# Altium PCB old.PCB4.PcbDoc
Units mm, origin at the board's own origin, x right, y up, seen from the top; angles counter-clockwise.
Board outline 66.42 x 80.14 mm, 2 copper layers (Top Layer, Bottom Layer); 59 components, 64 nets, 251 pads, 43 vias.
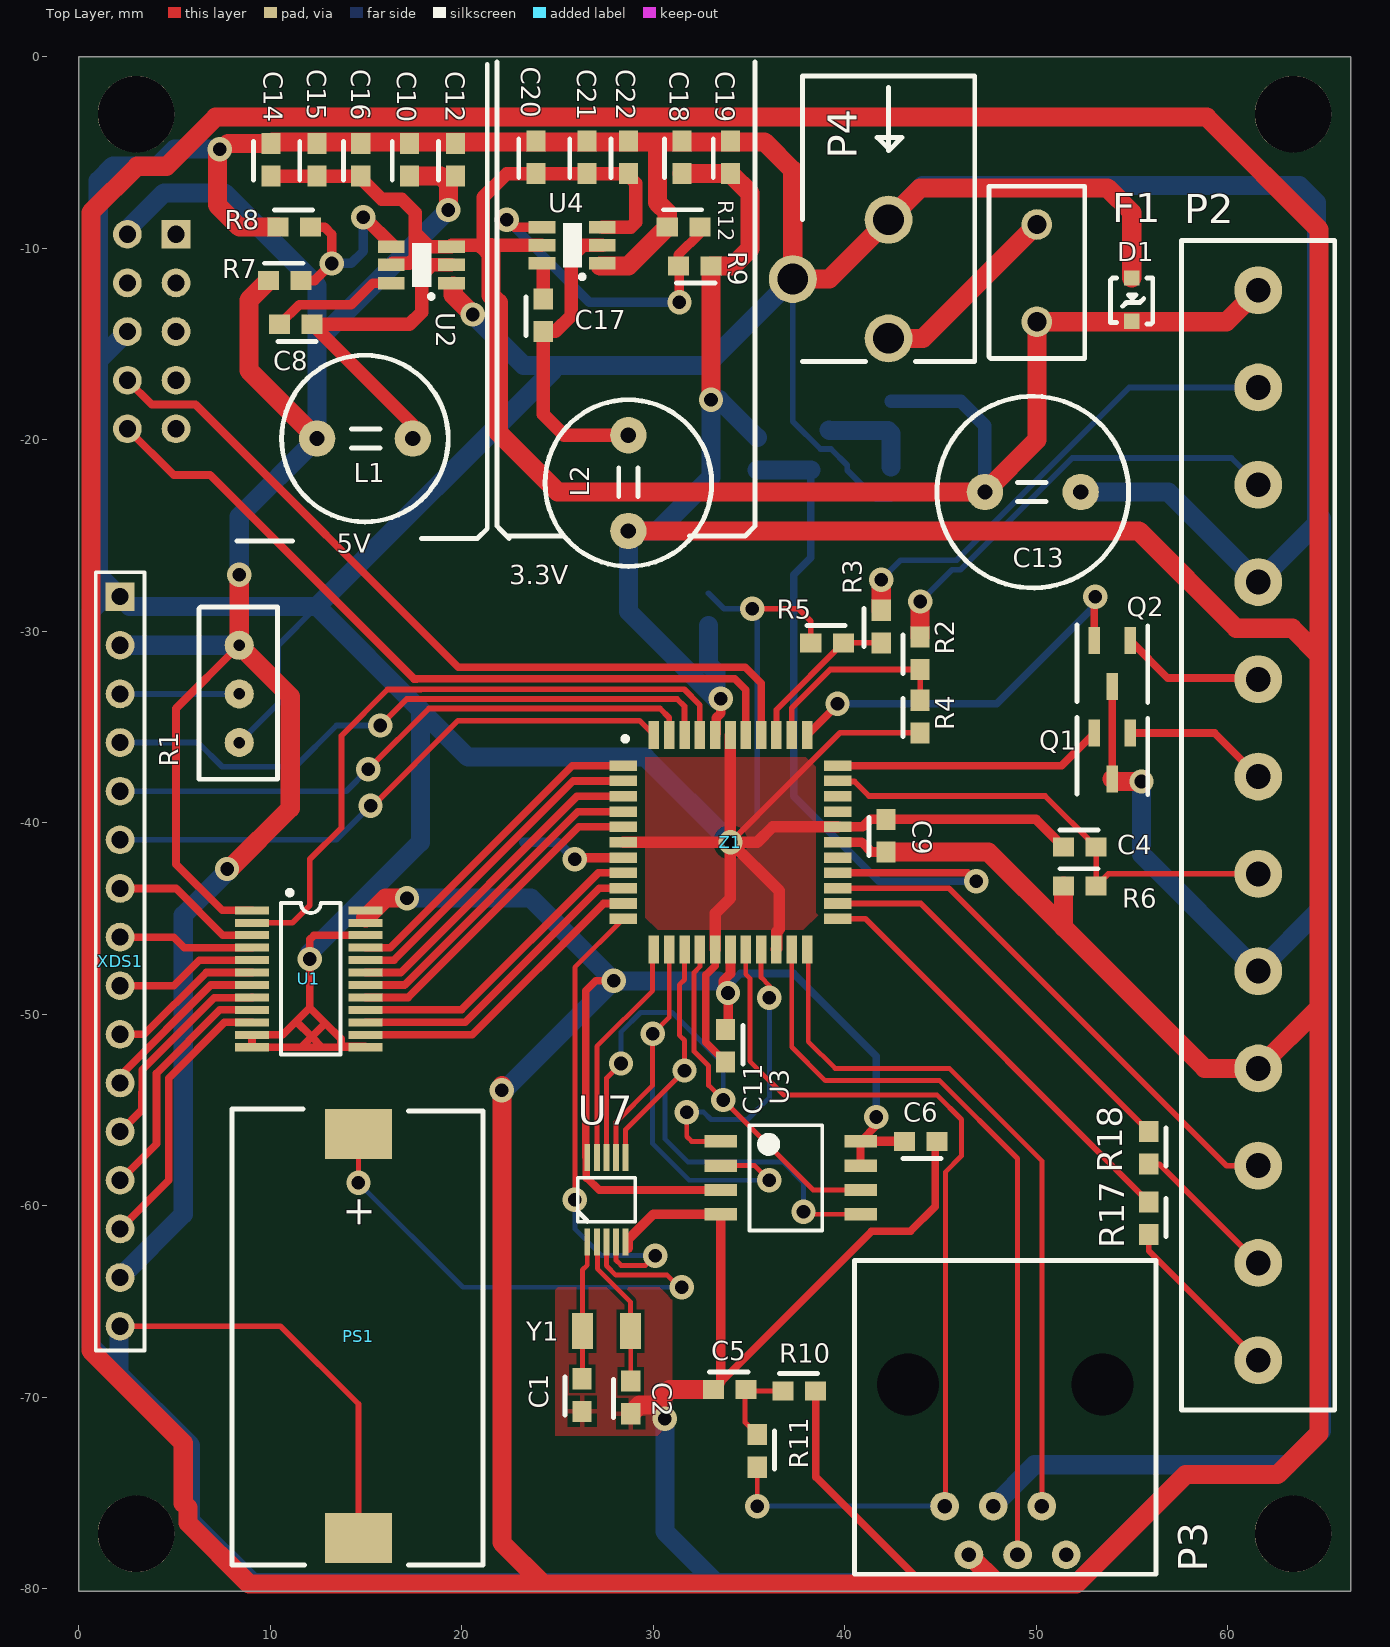
[diagram p0: Top Layer view]
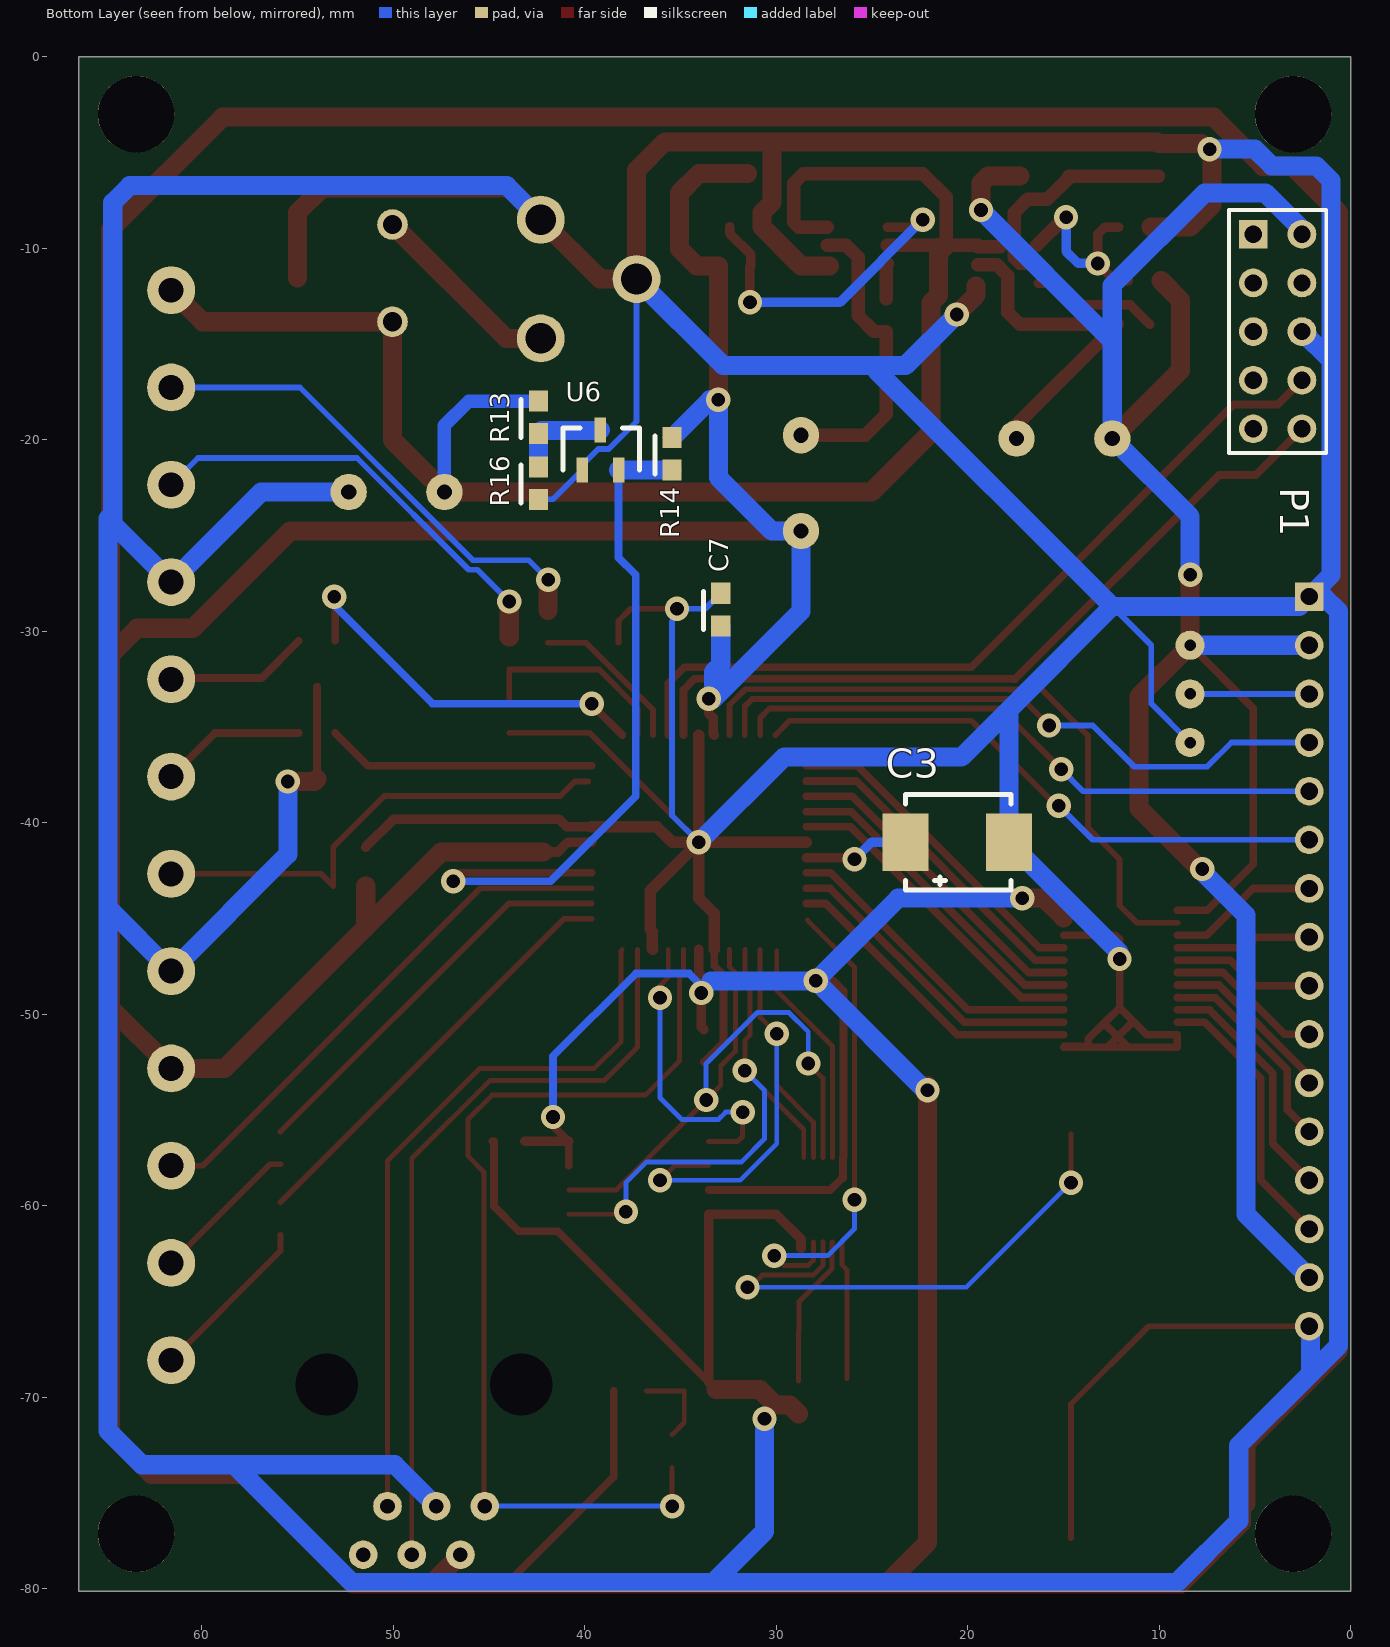
[diagram p1: Bottom Layer view, seen from below]

## Layer stack, top to bottom
Top Solder: solder mask 0.0102, Solder Resist, Dk 3.5
Top Layer: signal copper 0.0356
Dielectric 1: dielectric 0.32, FR-4, Dk 4.8
Bottom Layer: signal copper 0.0356
Bottom Solder: solder mask 0.0102, Solder Resist, Dk 3.5

## Board outline
0,-80.137 66.421,-80.137 66.421,0 0,0

## Design rules (kind name [scope] priority, off if disabled: settings)
Clearance [All] p1: gap=0.2 ignorepadtopadclearanceinfootprint=FALSE except(0: Arc-Hole Track-Hole SMDPad-Hole THPad-Hole Via-Hole Fill-Hole Poly-Hole Region-Hole Text-Hole)
HoleSize [All] p1: absolutevalues=TRUE maxlimit=999 minlimit=0.2 maxpercent=80.000 minpercent=20.000
MinimumSolderMaskSliver [All] p1: minsoldermaskwidth=0.1
PolygonConnect [All] p1: connectstyle=Relief reliefconductorwidth=0.254 reliefentries=4 polygonreliefangle="90 Angle" airgapwidth=0.254
RoutingVias [All] p1: holewidth=0.711 width=1.27 viastyle="Through Hole" minholewidth=0.711 minwidth=1.27 maxholewidth=0.711 maxwidth=1.27
SilkToSilkClearance [All] p1: silktosilkclearance=0.1
SilkToSolderMaskClearance [IsPad] p1: minsilkscreentomaskgap=0.1 clearancetoexposedcopper=TRUE
SolderMaskExpansion [All] p1: expansion=0.102
Width [All] p1: maxlimit=10 minlimit=0.254 preferedwidth=0.254
26 further rules are at their usual default settings.

## Classes and differential pairs
component class Ecran: R1 U1 XDS1
component class OTHER: P1 P2 Q1 Q2 R2 R3 R4 R5 R17 R18
component class PIC: C1 C2 C3 C4 C5 C6 C7 C9 C11 P3 R6 R10 R11 U3 U7 Y1 Z1
component class Power: 1 C8 C10 C12 C13 C14 C15 C16 C17 C18 C19 C20 C21 C22 D1 F1 L1 L2 P4 PS1 R7 R8 R9 R12 R13 R14 R16 U2 U4 U6
component class VRAIMENTHORSPCB: * B1 D4 DS1 MCL039PURGW P5
net class RG_LED[0..1]: RG_LED0 RG_LED1
net class S_D[0..7]: S_D0 S_D1 S_D2 S_D3 S_D4 S_D5 S_D6 S_D7

## Components (designator, comment, footprint, x,y, rotation, side; value= is the part's Value field where it differs from the comment)
C1 "18pF" 0603 26.289,-70.739 r90 top
C2 "18pF" 0603 28.829,-70.866 r90 top
C3 "10uF" C3 23.241,-41.021 r180 bottom
C4 "100nF" 0603 51.435,-41.275 r0 top
C5 "0.1uF" 0603 33.147,-69.596 r0 top
C6 "22uF" 0603 44.831,-56.642 r180 top
C7 "0.1uF" 0603 32.893,-29.718 r90 bottom
C8 "0.1uF" 0603 12.192,-13.97 r180 top
C9 "0.1uF" 0603 42.164,-41.529 r90 top
C10 "22uF" 0603 17.27,-6.231 r90 top
C11 "0.1uF" 0603 33.782,-50.8 r270 top
C12 "22uF" 0603 19.683,-6.231 r90 top
C13 "1000uF" Condo_trav 52.324,-22.733 r180 top
C14 "10uF" 0603 10.031,-6.231 r90 top
C15 "10uF" 0603 12.444,-6.231 r90 top
C16 "0.1uF" 0603 14.73,-6.231 r90 top
C17 "0.1uF" 0603 24.257,-14.351 r90 top
C18 "22uF" 0603 31.498,-6.104 r90 top
C19 "22uF" 0603 34.038,-6.104 r90 top
C20 "10uF" 0603 23.878,-6.104 r90 top
C21 "10uF" 0603 26.545,-6.104 r90 top
C22 "0.1uF" 0603 28.702,-6.104 r90 top
D1 "Diode 10TQ035" DiodeZin 54.991,-11.557 r270 top
F1 "Fuse 1" FUSIBLE 50.038,-8.763 r270 top
L1 "4.7uH" "Bobine Traversante 4.7" 12.446,-19.939 r0 top
L2 "3.3uH" "Bobine Traversante 4.7" 28.702,-24.765 r90 top
P1 "61304021121" HDR2X5 5.08,-9.271 r270 bottom
P2 "31101112" Bornier12 61.595,-68.072 r90 top
P3 "90512-001LF" RJ12 43.307,-69.342 r0 top
P4 "FC681465P" JackAlim 42.291,-8.509 r270 top
PS1 "Support Pile" Pile 14.605,-56.261 r270 top
Q1 "MOSFET-N" nouveau_mosfetN 53.975,-37.719 r180 top
Q2 "MOSFET-N" nouveau_mosfetN 53.975,-32.893 r180 top
R1 "20k" POTARD 8.382,-30.734 r270 top
R2 "300k" 0603 43.942,-32.004 r90 top
R3 "300k" 0603 41.91,-30.607 r90 top
R4 "100k" 0603 43.942,-35.306 r90 top
R5 "100k" 0603 38.227,-30.607 r0 top
R6 "330" 0603 51.435,-43.307 r0 top
R7 "54.9K" 0603 9.906,-11.684 r0 top
R8 "10K" 0603 10.412,-8.898 r0 top
R9 "33.2K" 0603 33.02,-10.922 r180 top
R10 "10K" 0603 36.781,-69.674 r0 top
R11 "1Ko" 0603 35.433,-71.96 r270 top
R12 "10K" 0603 30.734,-8.89 r0 top
R13 "300k" 0603 42.418,-19.685 r90 bottom
R14 "330" 0603 35.433,-21.59 r90 bottom
R16 "100k" 0603 42.418,-23.114 r90 bottom
R17 "60.4" 0603 55.88,-59.817 r270 top
R18 "75" 0603 55.88,-56.134 r270 top
U1 "74LVX4245MTCX" TRANS 14.986,-44.577 r270 top
U2 "TPS562201DDCT" TPS562201DDCT 17.016,-11.819 r90 top
U3 "SST25VF016B-50-4C-S2AF-T" FLASH 33.528,-56.642 r0 top
U4 "TPS562201DDCT" TPS562201DDCT 24.892,-10.795 r90 top
U6 "LM809M3-3.08/NOPB" LM809 40.132,-21.59 r90 bottom
U7 "MCP79510-I/MS" rtc 27.559,-59.69 r90 top
XDS1 "1-826629-6" HDR1X16 2.159,-28.194 r270 top
Y1 "32.768kHz" QUARTZ32KHz 27.559,-66.548 r0 top
Z1 "PIC32MX170F256D-I/PT" TQFP-44_L 34.036,-41.021 r0 top

## Footprints (in the part's own frame and the unit in brackets; to place one, negate y for a bottom-side part, rotate by r counter-clockwise, add the part's x,y. Pads: shape width x height; smd on the part's side, far side on the other; paste and mask are expansions set on the pad)
0603 [mm] "Chip Inductor, Body 0.6x0.3mm, IPC High Density"
  rect 1.1x1 smd: 1(0,0) 2(1.7,0)
  silkscreen extent -0.2,0.9 1.8,0.9
"Bobine Traversante 4.7" [mm]
  round 1.9 hole 0.8: 1(0,0) 2(5,0)
  silkscreen extent -1.85,-4.35 6.85,4.35
Bornier12 [mm]
  round 2.5 hole 1.3: 1(0,0) 2(5.08,0) 3(10.16,0) 4(15.24,0) 5(20.32,0) 6(25.4,0) 7(30.48,0) 8(35.56,0) 9(40.64,0) 10(45.72,0) 11(50.8,0) 12(55.88,0)
  silkscreen extent -2.6,-4 58.48,4
C3 [mm]
  rect 2.4x3 smd: 1(0,0) 2(5.4,0)
  silkscreen extent 0,-2.5 5.5,2.5
Condo_trav [mm]
  round 1.9 hole 0.8: 1(0,0) 2(5,0)
  silkscreen extent -2.5,-5 7.5,5
DiodeZin [mm]
  rect 0.8x0.8 smd: 1(2.25,0) 3(0,0)
  silkscreen extent 0,-1.1 2.4,1.1
FLASH [mm] "8-Pin Plastic Medium Body Small Outline Package 1.27 mm Pitch, IPC Medium Density"
  rect 1.7x0.65 smd: 1(0,0) 2(0,-1.27) 3(0,-2.54) 4(0,-3.81) 5(7.3,-3.81) 6(7.3,-2.54) 7(7.3,-1.27) 8(7.3,0)
  silkscreen extent 1.5,-4.65 5.3,0.84
FUSIBLE [mm]
  round 1.6 hole 1: 1(0,0) 2(5.08,0)
  silkscreen extent -2,-2.5 7,2.5
HDR1X16 [mm] "Connector; Header; 16 Position"
  rect 1.5x1.5 hole 0.9: 1(0,0)
  round 1.5 hole 0.9: 2(2.54,0) 3(5.08,0) 4(7.62,0) 5(10.16,0) 6(12.7,0) 7(15.24,0) 8(17.78,0) 9(20.32,0) 10(22.86,0) 11(25.4,0) 12(27.94,0) 13(30.48,0) 14(33.02,0) 15(35.56,0) 16(38.1,0)
  silkscreen extent -1.27,-1.27 39.37,1.27
HDR2X5 [mm] "Connector; Header; 5x2 Position"
  rect 1.5x1.5 hole 0.9: 1(0,0)
  round 1.5 hole 0.9: 2(0,2.54) 3(2.54,0) 4(2.54,2.54) 5(5.08,0) 6(5.08,2.54) 7(7.62,0) 8(7.62,2.54) 9(10.16,0) 10(10.16,2.54)
  silkscreen extent -1.27,-1.27 11.43,3.81
JackAlim [mm]
  round 2.5 hole 1.6: 1(6.2,0) 2(3.1,-5) 3(0,0)
  silkscreen extent -7.5,-4.5 7.4,4.5
LM809 [mm]
  rect 1.3x0.6 smd: 1(0,0) 2(0,-1.9) 3(2.1,-0.95)
  silkscreen extent 0,-3 2.2,1
nouveau_mosfetN [mm]
  rect 0.6x1.4 smd: 1(-0.95,-2.4) 2(0.95,-2.4) 3(0,0)
  silkscreen extent -1.85,-3.23 1.85,0.83
Pile [mm]
  rect 2.6x3.5 smd: 1(0,0) 2(21.1,0)
  silkscreen extent -1.3,-6.6 22.5,6.5
POTARD [mil]
  round 60 hole 23.62: 1(0,0) 2(100,0) 3(200,0)
  silkscreen extent -79,-83 276,79
QUARTZ32KHz [mm]
  rect 1.1x1.9 smd: 1(-1.25,0) 2(1.25,0)
RJ12 [mm]
  round 1.524 hole 3.25 unplated: 0(0,0) 0(10.16,0)
  round 1.5 hole 0.762: 1(1.91,-6.35) 2(3.18,-8.89) 3(4.45,-6.35) 4(5.72,-8.89) 5(6.99,-6.35) 6(8.26,-8.89)
  silkscreen extent -2.8,-9.91 12.96,6.47
rtc [mm]
  rect 1.4x0.3 smd: 1(-2.2,1) 2(-2.2,0.5) 3(-2.2,0) 4(-2.2,-0.5) 5(-2.2,-1) 6(2.2,-1) 7(2.2,-0.5) 8(2.2,0) 9(2.2,0.5) 10(2.2,1)
  silkscreen extent -1.15,-1.5 1.15,1.5
TPS562201DDCT [mm]
  rect 0.65x1.4 smd: 1(0,-2.45) 2(0.95,-2.45) 3(1.9,-2.45) 4(1.9,0.7) 5(0.95,0.7) 6(0,0.7)
  silkscreen extent -0.8,-1.5 2.1,-0.4
TQFP-44_L [mm] "44-Pin Thin Quad Flat Pack 0.8 mm Pitch, 1.0/0.1 mm Lead Form, IPC High Density"
  rect 1.45x0.55 smd: 1(-5.6,4) 2(-5.6,3.2) 3(-5.6,2.4) 4(-5.6,1.6) 5(-5.6,0.8) 6(-5.6,0) 7(-5.6,-0.8) 8(-5.6,-1.6) 9(-5.6,-2.4) 10(-5.6,-3.2) 11(-5.6,-4) 23(5.6,-4) 24(5.6,-3.2) 25(5.6,-2.4) 26(5.6,-1.6) 27(5.6,-0.8) 28(5.6,0) 29(5.6,0.8) 30(5.6,1.6) 31(5.6,2.4) 32(5.6,3.2) 33(5.6,4)
  rect 0.55x1.45 smd: 12(-4,-5.6) 13(-3.2,-5.6) 14(-2.4,-5.6) 15(-1.6,-5.6) 16(-0.8,-5.6) 17(0,-5.6) 18(0.8,-5.6) 19(1.6,-5.6) 20(2.4,-5.6) 21(3.2,-5.6) 22(4,-5.6) 34(4,5.6) 35(3.2,5.6) 36(2.4,5.6) 37(1.6,5.6) 38(0.8,5.6) 39(0,5.6) 40(-0.8,5.6) 41(-1.6,5.6) 42(-2.4,5.6) 43(-3.2,5.6) 44(-4,5.6)
  silkscreen extent -5.62,5.28 -5.37,5.52
TRANS [mm] "Shrink Small Outline; 24 Leads; Body Width 4.4 mm; Pitch 0.65 mm"
  rect 0.42x1.78 smd: 1(0,-5.94) 2(0.65,-5.94) 3(1.3,-5.94) 4(1.95,-5.94) 5(2.6,-5.94) 6(3.25,-5.94) 7(3.9,-5.94) 8(4.55,-5.94) 9(5.2,-5.94) 10(5.85,-5.94) 11(6.5,-5.94) 12(7.15,-5.94) 13(7.15,0) 14(6.5,0) 15(5.85,0) 16(5.2,0) 17(4.55,0) 18(3.9,0) 19(3.25,0) 20(2.6,0) 21(1.95,0) 22(1.3,0) 23(0.65,0) 24(0,0)
  silkscreen extent -1.05,-4.42 7.53,-1.31

## Part data
C1 C2 C4 C5 C7 C9 C11 C13: library part Cap, "Capacitor"
C3: library part "Cap Pol1"
C6: library part Cap, "Cout_Reg_3.3v"
C8 C10 C12 C14 C15 C16 C17 C18 C19 C20 C21 C22: library part Cap, "Reg_5v"
D1: "Diode Zenner"
F1: "Fuse"
L1: library part Inductor, "L_Reg_5v"
L2: library part Inductor, "L_Reg_3v"
P1: library part "Header 5X2", "Header, 5-Pin, Dual row"
P2: library part "Header 12", "Header, 12-Pin"
P3: library part "Header 6", "PortRJ12_debug"
P4: library part FC68148S, "Power connector"
PS1: library part SMTU-1225-1-LF
Q1 Q2: "N-Channel MOSFET"
R1: library part RPot, "Potentiometer"
R2 R3 R4 R5 R6 R7 R8 R9 R10 R11 R12 R13 R14 R16 R17 R18: library part Res2, "Resistor"
U1: "Bus Transceiver"
U2 U4: "Reg 12V-5V"
U3: library part Memoire, "FLASH"
U6: "Voltage Monitor"
U7: library part MCP79510, "RTC"
XDS1: library part "Header 16", "Header, 16-Pin"
Y1: library part XTAL, "Crystal Oscillator"
Z1: library part PIC32_1, "PIC"

## Free pads (board coordinates)
  round 4 hole 4: 3(3,-77.137) 3(3,-3) 3(63.421,-77.137) 3(63.421,-3)

## Via types
v1: diameter 1.27, hole 0.711, Top Layer to Bottom Layer, 43 vias

## Nets (pads, with @x,y where several pads share a name; then routed paths per layer and width w, separated by ;. In a path a pad name is that pad's centre, name@x,y a point inside that pad or via, vN(x,y) a via of type N, cw(c..) or ccw(c..) an arc to the next point about the centre after c; other vN are vias at no path point)
5VDC: C10.1 C12.1 L1.1 P1.2 R1.1 R7.1 U1.1 XDS1.2 XDS1.15 | length 118.7
  Top Layer w0.4: R1.1 5.08,-34.036 5.08,-42.164 7.493,-44.577 U1.1
  Top Layer w1: v1(7.747,-42.418) 7.874,-42.418 11.049,-39.243 11.049,-33.401 R1.1 v1(8.382,-27.051) ; R7.1 8.89,-12.7 8.89,-16.383 L1.1 ; C10.1 18.925,-6.231 19.304,-6.61 v1(19.304,-8.001)
  Bottom Layer w1: XDS1.15 5.461,-60.452 5.461,-44.831 7.747,-42.545 v1(7.747,-42.418) ; XDS1.2 R1.1 ; P1.2 2.54,-9.017 4.445,-7.112 7.62,-7.112 12.446,-11.938 12.446,-14.859 ; v1(8.382,-27.051) 8.382,-24.003 L1.1 12.446,-14.859 ; v1(19.304,-8.001) 12.446,-14.859
12VDC: C13.2 C14.1 C15.1 C16.1 C20.1 C21.1 C22.1 D1.1 F1.2 P2.12 R13.2 U2.3 U2.5 U4.3 U4.5 | length 102.3
  Top Layer w0.7: C14.1 C15.1 C16.1 14.73,-6.348 15.833,-7.451 16.874,-7.451 17.568,-8.145 17.568,-9.186 ; U2.5@16.391,-10.794 17.27,-10.794 17.566,-10.498 17.566,-9.188 17.568,-9.186 ; U2.3 18.301,-9.919 17.568,-9.186 ; U2.3@19.466,-9.844 21.123,-9.844 21.123,-7.325 22.344,-6.104 C20.1 C21.1 28.583,-6.104 29.085,-6.606 29.085,-8.634 28.824,-8.895 U4.3 ; 21.124,-9.845 U4.5
  Top Layer w1: 21.123,-9.844 21.124,-9.845 21.524,-10.245 ; 21.524,-9.972 21.524,-10.245 ; P2.12 59.944,-13.843 F1.2 50.038,-20.019 C13.2 25.019,-22.733 21.909,-19.623 21.909,-12.844 21.524,-12.459 21.524,-10.245
  Bottom Layer w0.7: R13.2 46.052,-17.985 47.324,-19.257 C13.2
CMD_SERVO: P2.3 Z1.25 | length 28
  Top Layer w0.3: Z1.25 45.453,-43.421 59.944,-57.912 P2.3
CR_DATA0_3V: R2.1 R4.2 Z1.35 | length 10.5
  Top Layer w0.3: Z1.35 37.236,-34.011 39.243,-32.004 R2.1 R4.2
CR_DATA0_12V: P2.10 R2.2 | length 23.2
  Top Layer w1: R2.2 v1(43.942,-28.448)
  Bottom Layer w0.3: v1(43.942,-28.448) 45.601,-26.789 46.054,-26.789 51.888,-20.955 60.198,-20.955 P2.10
CR_DATA1_3V: R3.1 R5.2 Z1.36 | length 8.2
  Top Layer w0.3: Z1.36 36.436,-34.098 R5.2 R3.1
CR_DATA1_12V: P2.11 R3.2 | length 25.4
  Top Layer w1: R3.2 v1(41.91,-27.305)
  Bottom Layer w0.3: v1(41.91,-27.305) 42.926,-26.289 45.847,-26.289 54.864,-17.272 P2.11
CR_LED_G: Q2.2 Z1.34 | length 20.4
  Top Layer w0.4: Z1.34 39.624,-33.833 v1(39.624,-33.782) ; v1@52.959,-28.448 53.025,-28.514 53.025,-28.702 Q2.2
  Bottom Layer w0.4: v1(39.624,-33.782) 47.945,-33.782 53.086,-28.641 v1(53.086,-28.194)
CR_LED_G_CTRL: P2.8 Q2.1 | length 7.5
  Top Layer w0.4: Q2.1 56.878,-32.446 P2.8@61.529,-32.446
  Top Layer w1: P2.8@61.529,-32.446 P2.8
CR_LED_R: Q1.2 Z1.33 | length 14.1
  Top Layer w0.4: Z1.33 51.323,-37.021 Q1.2
CR_LED_R_CTRL: P2.7 Q1.1 | length 7.6
  Top Layer w0.4: Q1.1 59.322,-35.319 P2.7
FLSH_CE: U3.1 Z1.19 | length 16
  Top Layer w0.254: v1(31.75,-55.118) 31.75,-56.388 32.004,-56.642 U3.1 ; Z1.19 35.636,-48.082 36.068,-48.514 v1(36.068,-49.149)
  Bottom Layer w0.254: v1(31.75,-55.118) 32.639,-55.118 33.02,-55.499 34.925,-55.499 36.068,-54.356 v1(36.068,-49.149)
GND: C1.1 C2.1 C3.2 C4.1 C5.1 C6.1 C7.2 C9.2 C10.2 C11.2 C12.2 C13.1 C14.2 C15.2 C16.2 C18.2 C19.2 C20.2 C21.2 C22.2 D1.3 P1.6 P2.5 P2.9 P3.3 P4.2 P4.3 PS1.2 Q1.3 Q2.3 R1.3 R4.1 R5.1 R8.1 R12.1 R16.1 U1.11 U1.12 U1.13 U1.22 U2.1 U3.4 U4.1 U6.1 U7.5 XDS1.1 XDS1.16 Z1.6 Z1.16 Z1.20 Z1.29 Z1.39 | length 651.1
  Top Layer w0.3: XDS1.16 10.541,-66.294 14.605,-70.358 PS1.2 ; v1(34.036,-41.021) 39.751,-35.306 R4.1 ; v1(35.179,-28.829) 37.592,-28.829 38.227,-29.464 R5.1
  Top Layer w0.4: U1.22 12.289,-45.877 12.065,-46.101 v1(12.065,-47.117) 12.065,-49.657 ; C5.1 33.528,-69.215 41.402,-61.341 43.434,-61.341 44.732,-60.043 44.732,-56.642 C6.1 ; Z1.16 33.236,-47.469 32.747,-47.958 32.747,-51.465 C11.2 ; Q1.3 Q2.3 ; 11.355,-50.367 11.355,-50.382 12.163,-51.19 ; 11.355,-50.367 10.645,-51.077 U1.11 U1.12 11.626,-51.727 ; 11.355,-50.367 12.065,-49.657 ; 11.626,-51.727 12.7,-51.727 ; 11.626,-51.727 12.163,-51.19 ; 12.065,-49.657 12.881,-50.473 ; 12.163,-51.19 12.7,-51.727 ; 12.163,-51.19 12.881,-50.473 ; 12.7,-51.727 U1.13 14.946,-51.687 13.696,-51.687 13.696,-51.288 12.881,-50.473
  Top Layer w0.5: U7.5@28.702,-62.23 28.702,-61.747 29.997,-60.452 U3.4 C5.1@33.528,-69.215 ; Z1.29 40.932,-40.221 41.324,-39.829 C9.2 49.989,-39.829 C4.1
  Top Layer w0.6: Z1.6 v1(34.036,-41.021) ; Z1.16 33.236,-44.742 34.036,-43.942 v1(34.036,-41.021) ; Z1.39 v1(34.036,-41.021) ; Z1.20 36.461,-46.596 36.461,-45.689 36.576,-45.574 36.576,-43.561 v1(34.036,-41.021) ; Z1.29 36.233,-40.221 35.433,-41.021 v1(34.036,-41.021)
  Top Layer w1: v1@7.239,-5.08 7.239,-7.747 8.39,-8.898 R8.1 ; v1@7.788,-4.531 C14.2 ; C14.2@10.117,-4.445 19.683,-4.445 28.702,-4.445 30.226,-4.445 ; U2.1@19.558,-11.986 19.558,-12.446 v1(20.574,-13.462) ; U4.1@27.215,-10.922 28.702,-10.922 ; C2.1 29.279,-70.416 30.029,-70.416 30.849,-69.596 C5.1 ; 28.829,-10.795 R12.1 30.734,-8.128 30.226,-7.62 30.226,-4.445 ; Q1.3 54.102,-37.846 v1(55.499,-37.846) ; D1.3 54.991,-8.128 53.721,-6.858 43.942,-6.858 P4.3 39.191,-11.609 P4.2 37.291,-5.922 35.814,-4.445 30.226,-4.445
  Bottom Layer w0.3: R1.3 10.414,-33.782 10.414,-30.734 12.446,-28.702 ; C7.2 33.704,-28.829 v1(35.179,-28.829) ; v1(34.036,-41.021) 35.433,-39.624 35.433,-29.493 ; P4.2 37.291,-19.044 38.737,-20.49 39.286,-20.49 40.132,-21.336 U6.1 41.656,-23.114 R16.1
  Bottom Layer w1: XDS1.16 2.095,-66.358 2.095,-68.77 ; P1.6 1.016,-15.875 ; v1(7.366,-4.826) 4.992,-4.826 4.118,-5.7 1.793,-5.7 1.016,-6.477 1.016,-15.875 ; v1(12.065,-47.117) 12.065,-46.797 C3.2 17.841,-34.097 ; v1(20.574,-13.462) 23.241,-16.129 32.771,-16.129 P4.2 ; 24.765,-16.383 12.446,-28.702 ; v1(30.607,-71.12) 30.607,-77.015 33.274,-79.682 ; v1(34.036,-41.021) 29.591,-36.576 20.32,-36.576 17.841,-34.097 ; P4.3 44.069,-6.731 63.754,-6.731 64.643,-7.62 64.643,-24.384 ; P3.3 49.916,-73.533 58.317,-73.533 ; C13.1 56.896,-22.733 P2.9 64.643,-24.384 ; v1(55.499,-37.846) 55.499,-41.656 P2.5 64.897,-44.45 ; 1.016,-15.875 1.016,-27.051 XDS1.1 ; 2.095,-68.77 0.635,-67.31 0.635,-28.956 1.397,-28.194 XDS1.1 ; 2.095,-68.77 5.842,-72.517 5.842,-76.454 9.07,-79.682 33.274,-79.682 ; XDS1.1 2.667,-28.702 12.446,-28.702 ; 12.446,-28.702 17.841,-34.097 ; 33.274,-79.682 52.168,-79.682 58.317,-73.533 ; 58.317,-73.533 63.119,-73.533 64.897,-71.755 64.897,-44.45 ; 64.643,-24.384 64.897,-24.13 64.897,-44.45
MCLR: P3.1 R11.2 Z1.18 | length 50.6
  Top Layer w0.254: Z1.18 34.836,-47.917 35.052,-48.133 35.052,-52.451 36.83,-54.229 44.831,-54.229 46.101,-55.499 46.101,-57.404 45.259,-58.246 45.259,-75.65 P3.1 ; v1(35.433,-75.692) R11.2
  Bottom Layer w0.254: v1(35.433,-75.692) P3.1
NetC3_1: C3.1 Z1.7 | length 5.5
  Top Layer w0.5: v1@25.997,-41.821 Z1.7
  Bottom Layer w0.5: C3.1 25.019,-41.021 v1(25.908,-41.91)
NetC5_2: C5.2 R10.1 R11.1 | length 4.5
  Top Layer w0.254: R11.1 34.798,-71.325 34.798,-69.674 R10.1
NetC8_1: C8.1 L1.2 U2.2 | length 17.8
  Top Layer w0.5: L1.2 L1.2@17.446,-19.224
  Top Layer w0.7: L1.2@17.446,-19.224 C8.1 17.272,-13.97 17.907,-13.335 17.907,-11.43 18.468,-10.869 U2.2
NetC8_2: C8.2 U2.6 | length 6.7
  Top Layer w0.5: C8.2 11.508,-12.954 14.224,-12.954 15.359,-11.819 U2.6
NetC17_1: C17.1 L2.2 U4.2 | length 16
  Top Layer w0.7: U4.2 26.35,-9.845 25.715,-10.48 25.715,-13.528 24.892,-14.351 C17.1 24.257,-18.669 25.353,-19.765 L2.2
NetC17_2: C17.2 U4.6 | length 1.9
  Top Layer w0.7: U4.6 24.257,-10.86 C17.2
NetF1_1: F1.1 P4.1 | length 10.2
  Top Layer w1: P4.1 44.092,-14.709 F1.1
NetP2_1: P2.1 R17.2 | length 8.9
  Top Layer w0.3: R17.2 55.88,-62.357 P2.1
NetP2_2: P2.2 R18.2 | length 7.9
  Top Layer w0.3: R18.2 56.437,-57.834 P2.2
NetR7_2: R7.2 R8.2 U2.4 | length 10.6
  Top Layer w0.5: R7.2 12.319,-11.684 v1(13.208,-10.795) 13.208,-9.271 12.835,-8.898 R8.2
  Top Layer w0.7: v1(14.859,-8.382) 14.913,-8.382 U2.4@16.383,-9.852
  Bottom Layer w0.5: v1(13.208,-10.795) 14.224,-10.795 14.859,-10.16 v1(14.859,-8.382)
NetR9_2: R9.2 R12.2 U4.4 | length 17.2
  Top Layer w0.5: v1(22.352,-8.509) 22.738,-8.895 U4.4 ; v1(31.369,-12.827) 31.369,-10.971 R9.2 31.32,-10.336 32.434,-9.222 R12.2
  Bottom Layer w0.5: v1(22.352,-8.509) 26.67,-12.827 v1(31.369,-12.827)
PGEC1: P3.5 Z1.22 | length 37.6
  Top Layer w0.254: Z1.22 38.1,-46.685 38.1,-51.435 39.497,-52.832 45.466,-52.832 50.297,-57.663 P3.5
PGED1: P3.4 Z1.21 | length 40
  Top Layer w0.254: Z1.21 37.236,-51.714 38.989,-53.467 44.958,-53.467 49.027,-57.536 P3.4
PIC_RASPI_RXD: P1.8 Z1.37 | length 42.4
  Top Layer w0.4: P1.8 3.81,-18.161 6.096,-18.161 19.812,-31.877 34.798,-31.877 35.636,-32.715 Z1.37
PIC_RASPI_TXD: P1.10 Z1.38 | length 40.3
  Top Layer w0.4: P1.10 4.953,-21.844 6.858,-21.844 17.507,-32.493 17.639,-32.493 17.646,-32.486 34.264,-32.486 34.836,-33.058 Z1.38
POT_CONTRASTE: R1.2 XDS1.3 | length 6.2
  Bottom Layer w0.3: XDS1.3 R1.2
POWEROK: R14.1 U6.2 Z1.26 | length 39
  Top Layer w0.4: Z1.26 46.431,-42.621 v1(46.863,-43.053)
  Bottom Layer w0.4: U6.2 38.232,-26.157 37.338,-27.051 37.338,-38.608 41.783,-43.053 v1(46.863,-43.053)
  Bottom Layer w1: R14.1 U6.2
RG_LED0: R17.1 Z1.23 | length 22.4
  Top Layer w0.3: Z1.23 41.084,-45.021 R17.1
RG_LED1: R18.1 Z1.24 | length 21.2
  Top Layer w0.3: Z1.24 43.967,-44.221 R18.1
RTC_CS: U7.4 Z1.11 | length 25.2
  Top Layer w0.254: v1(25.908,-59.69) 25.908,-47.549 Z1.11@28.372,-45.085 ; U7.4 28.059,-62.857 28.321,-63.119 29.591,-63.119 v1(30.099,-62.611)
  Bottom Layer w0.254: v1(25.908,-59.69) 25.908,-61.214 27.305,-62.611 v1(30.099,-62.611)
RTC_MFP: U7.9 Z1.12 | length 12
  Top Layer w0.254: U7.9 27.059,-51.681 29.972,-48.768 Z1.12@29.972,-46.685
S_D0: U1.21 Z1.1 | length 17.4
  Top Layer w0.4: U1.21 16.261,-46.527 25.767,-37.021 Z1.1
S_D1: U1.20 Z1.2 | length 17.3
  Top Layer w0.4: U1.20 16.46,-47.177 25.816,-37.821 Z1.2
S_D2: U1.19 Z1.3 | length 17.3
  Top Layer w0.4: U1.19 16.816,-47.827 26.022,-38.621 Z1.3
S_D3: U1.18 Z1.4 | length 17.2
  Top Layer w0.4: U1.18 17.015,-48.477 26.071,-39.421 Z1.4
S_D4: U1.17 Z1.5 | length 17.1
  Top Layer w0.4: U1.17 17.213,-49.127 26.119,-40.221 Z1.5
S_D5: U1.16 Z1.8 | length 16.4
  Top Layer w0.4: U1.16 19.986,-49.777 27.142,-42.621 Z1.8
S_D6: U1.15 Z1.9 | length 16.4
  Top Layer w0.4: U1.15 20.185,-50.427 27.191,-43.421 Z1.9
S_D7: U1.14 Z1.10 | length 16.3
  Top Layer w0.4: U1.14 20.551,-51.077 27.407,-44.221 Z1.10
S_E: XDS1.6 Z1.44 | length 30.8
  Top Layer w0.3: v1(15.24,-39.116) 15.367,-39.116 19.812,-34.671 29.286,-34.671 Z1.44
  Bottom Layer w0.3: XDS1.6 13.462,-40.894 v1(15.24,-39.116)
S_RS: XDS1.4 Z1.42 | length 33.1
  Top Layer w0.3: v1(15.748,-34.925) 17.13,-33.543 18.074,-33.543 18.081,-33.536 31.25,-33.536 31.636,-33.922 Z1.42
  Bottom Layer w0.3: XDS1.4 6.223,-35.814 7.493,-37.084 11.303,-37.084 13.462,-34.925 v1(15.748,-34.925)
S_RW: XDS1.5 Z1.43 | length 31.6
  Top Layer w0.3: v1(15.113,-37.211) 18.288,-34.036 30.353,-34.036 30.836,-34.519 Z1.43
  Bottom Layer w0.3: XDS1.5 13.97,-38.354 v1(15.113,-37.211)
SPI_SCK: U3.6 U7.8 Z1.15 | length 33.4
  Top Layer w0.254: U7.8 27.559,-53.34 v1(28.321,-52.578) ; Z1.15 32.436,-47.524 32.131,-47.829 32.131,-51.943 32.893,-52.705 32.893,-53.721 v1(33.655,-54.483) 38.354,-59.182 U3.6
  Bottom Layer w0.254: v1(28.321,-52.578) 28.321,-50.927 29.337,-49.911 30.988,-49.911 33.655,-52.578 v1(33.655,-54.483)
SPI_SI: U3.2 U7.7 Z1.13 | length 27.5
  Top Layer w0.254: U7.7 28.059,-55.634 29.972,-53.721 v1(29.972,-51.029) 30.836,-50.165 Z1.13 ; U3.2 35.306,-57.912 v1(36.068,-58.674)
  Bottom Layer w0.254: v1(29.972,-51.029) 29.972,-56.769 31.877,-58.674 v1(36.068,-58.674)
SPI_SO: U3.5 U7.6 Z1.14 | length 29.1
  Top Layer w0.254: U7.6 28.559,-56.023 v1(31.636,-52.946) 31.636,-51.365 31.369,-51.098 31.369,-48.469 31.636,-48.202 Z1.14 ; v1(37.846,-60.325) 37.973,-60.452 U3.5
  Bottom Layer w0.254: v1(31.636,-52.946) 30.607,-53.975 30.607,-56.515 31.804,-57.712 36.757,-57.712 37.846,-58.801 v1(37.846,-60.325)
STATUS_BTN: C4.2 P2.6 R6.2 Z1.32 | length 25.5
  Top Layer w0.3: Z1.32@39.818,-37.846 40.513,-37.846 41.275,-38.608 50.468,-38.608 C4.2 R6.2 53.77,-42.672 P2.6
TS_D0: U1.3 XDS1.7 | length 7.9
  Top Layer w0.4: XDS1.7 5.08,-43.434 7.523,-45.877 U1.3
TS_D1: U1.4 XDS1.8 | length 7.1
  Top Layer w0.4: XDS1.8 4.953,-45.974 5.506,-46.527 U1.4
TS_D2: U1.5 XDS1.9 | length 7.4
  Top Layer w0.4: XDS1.9 4.953,-48.514 6.29,-47.177 U1.5
TS_D3: U1.6 XDS1.10 | length 8.2
  Top Layer w0.4: XDS1.10 3.429,-51.054 6.656,-47.827 U1.6
TS_D4: U1.7 XDS1.11 | length 9.2
  Top Layer w0.4: XDS1.11 2.159,-53.213 6.895,-48.477 U1.7
TS_D5: U1.8 XDS1.12 | length 11
  Top Layer w0.4: XDS1.12 3.302,-54.991 3.302,-54.084 3.309,-54.077 3.309,-52.912 7.072,-49.149 9.024,-49.149 U1.8
TS_D6: U1.9 XDS1.13 | length 12.7
  Top Layer w0.4: XDS1.13 4.064,-56.769 4.064,-53.086 7.373,-49.777 U1.9
TS_D7: U1.10 XDS1.14 | length 14.5
  Top Layer w0.4: XDS1.14 4.699,-58.674 4.699,-53.34 7.612,-50.427 U1.10
TS_TR: U1.2 Z1.41 | length 34.6
  Top Layer w0.3: U1.2 11.161,-45.227 12.065,-44.323 12.065,-41.91 13.716,-40.259 13.716,-35.456 16.129,-33.043 17.867,-33.043 17.874,-33.036 31.616,-33.036 32.436,-33.856 Z1.41
U6_VCC: R13.1 R16.2 U6.3 | length 5
  Bottom Layer w1: U6.3 39.219,-19.527 42.26,-19.527 R13.1 R16.2
VBAT: PS1.1 U7.3 | length 27.3
  Top Layer w0.254: v1(14.605,-58.801) PS1.1 ; U7.3 27.559,-63.132 28.054,-63.627 30.734,-63.627 v1@31.432,-64.325
  Bottom Layer w0.254: v1(14.605,-58.801) 20.066,-64.262 v1(31.496,-64.262)
VOUT3.3: C6.2 C7.1 C9.1 C11.1 C18.1 C19.1 L2.1 P2.4 P3.2 R6.1 R9.1 R10.2 R14.2 U1.23 U1.24 U3.3 U3.7 U3.8 U7.10 Z1.17 Z1.28 Z1.40 | length 495.7
  Top Layer w0.4: 26.509,-58.563 26.509,-57.49 26.485,-57.466 26.485,-48.768 26.993,-48.26 v1(27.94,-48.26) ; 26.559,-58.563 27.178,-59.182 U3.3 ; R10.2 38.481,-74.168 44.069,-79.756 ; U3.7 U3.8 41.656,-55.814 v1(41.656,-55.372)
  Top Layer w0.5: Z1.40 33.286,-35.371 33.286,-34.535 33.528,-34.293 v1(33.528,-33.528) ; v1@33.655,-48.641 33.655,-48.26 34.036,-47.879 Z1.17 ; C11.1 33.909,-50.673 v1(33.909,-48.895) ; Z1.28 40.894,-41.021 41.402,-41.529 C9.1 ; U3.8 C6.2 ; P2.4@60.96,-52.832 P2.4
  Top Layer w1: 14.986,-44.967 16.011,-43.942 v1(17.145,-43.942) ; v1@22.098,-53.721 v1(22.098,-53.975) 22.098,-77.597 24.257,-79.756 ; L2.1 55.372,-24.765 60.452,-29.845 63.373,-29.845 64.77,-31.242 ; C18.1 C19.1 35.052,-7.118 35.052,-10.033 34.163,-10.922 R9.1 v1(33.02,-17.907) ; C9.1 47.498,-41.529 51.435,-45.466 ; P3.2 48.011,-79.756 ; 48.081,-79.756 48.011,-79.756 ; R6.1 51.435,-45.466 ; P2.4@60.96,-52.832 58.801,-52.832 51.435,-45.466 ; P2.4 64.77,-49.657 ; 24.257,-79.756 8.89,-79.756 5.7,-76.566 5.7,-75.78 5.461,-75.541 5.461,-72.39 0.635,-67.564 0.635,-8.128 3.048,-5.715 4.589,-5.715 7.15,-3.154 58.907,-3.154 64.77,-9.017 64.77,-31.242 ; 24.257,-79.756 44.069,-79.756 48.011,-79.756 ; 48.011,-79.756 52.094,-79.756 57.809,-74.041 62.611,-74.041 64.77,-71.882 64.77,-49.657 ; 64.77,-49.657 64.77,-31.242
  Bottom Layer w0.4: 33.401,-48.26 33.782,-48.641 34.544,-47.879 37.338,-47.879 41.656,-52.197 v1(41.656,-55.372)
  Bottom Layer w1: v1(17.145,-43.942) 23.622,-43.942 v1(27.94,-48.26) ; v1(22.098,-53.975) 22.225,-53.975 v1(27.94,-48.26) ; C7.1 32.893,-31.75 33.274,-32.131 33.274,-33.528 28.702,-28.956 L2.1 30.226,-24.765 33.02,-21.971 v1(33.02,-17.907) 33.45,-17.907 R14.2 ; 33.401,-48.26 v1(27.94,-48.26)
X1: C1.2 U7.1 Y1.1 | length 7.3
  Top Layer w0.254: C1.2 26.309,-69.019 Y1.1 26.309,-63.353 26.559,-63.103 U7.1
X2: C2.2 U7.2 Y1.2 | length 8
  Top Layer w0.254: U7.2 27.082,-61.913 27.082,-63.297 28.809,-65.024 Y1.2 28.829,-66.568 C2.2
pads on no net: P1.1 P1.3 P1.4 P1.5 P1.7 P1.9 P3.0 P3.6 Z1.27 Z1.30 Z1.31

## Polygon pours and split planes (outlines as drawn)
GND on Top Layer "GND PLAN" (solid, pour order 2): 25.019,-64.262 24.892,-64.389 24.892,-72.009 30.226,-72.009 30.607,-71.628 30.988,-71.247 30.988,-65.024 30.988,-64.897 30.353,-64.262
GND on Top Layer "GND PLAN" (solid, pour order 4): 29.591,-36.576 29.591,-44.958 30.226,-45.593 37.719,-45.593 37.846,-45.593 38.608,-44.831 38.481,-44.704 38.481,-37.211 38.481,-37.084 37.973,-36.576

## Silkscreen, mask and mechanical layers (free items; w line width, h text height)
Top Overlay:
  lines w0.254: 8.253,-25.281 11.174,-25.281 ; 17.905,-25.154 20.826,-25.154 21.334,-24.646 21.334,-0.389 ; 21.846,-0.262 21.846,-24.519 22.354,-25.027 25.275,-25.027 ; 21.971,-24.654 22.479,-25.162 ; 31.879,-25.027 34.8,-25.027 35.308,-24.519 35.308,-0.262
  text "5V" at 13.462,-25.908 h1
  text "3.3V" at 22.479,-27.559 h1

## Text inside footprints (layer, text, board x,y; h text height)
PS1: Top Overlay "+" at 14.005,-59.461 h1.52 r270